# Altium PCB backplane.PCBDOC (part 1 of 4)
Units mil, origin at the board's own origin, x right, y up, seen from the top; angles counter-clockwise.
Board outline 14000 x 4750 mil, 6 copper layers (Top Layer, Internal Plane 1, Mid-Layer 1, Mid-Layer 2, Internal Plane 2, Bottom Layer), stack 54.4 mil thick; 197 components, 240 nets, 1698 pads, 1024 vias.
Unrouted connection lines stored in the file: 2.
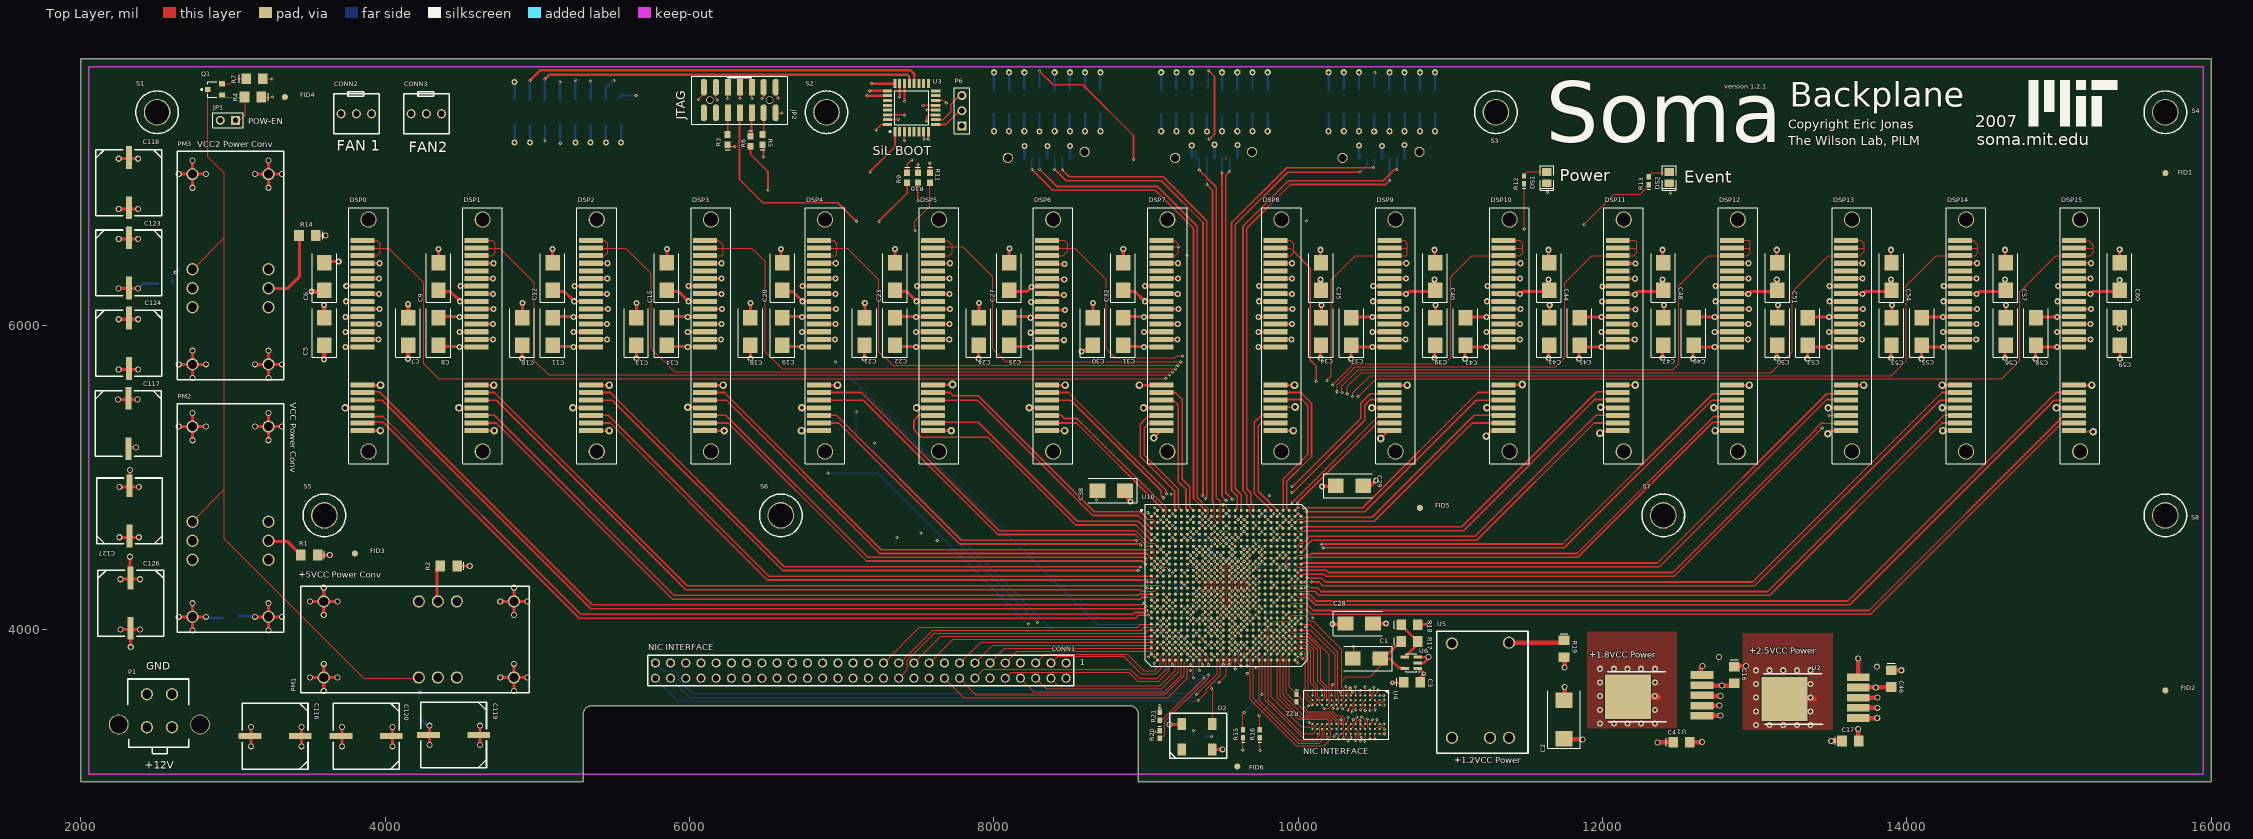
[diagram p0: Top Layer view]
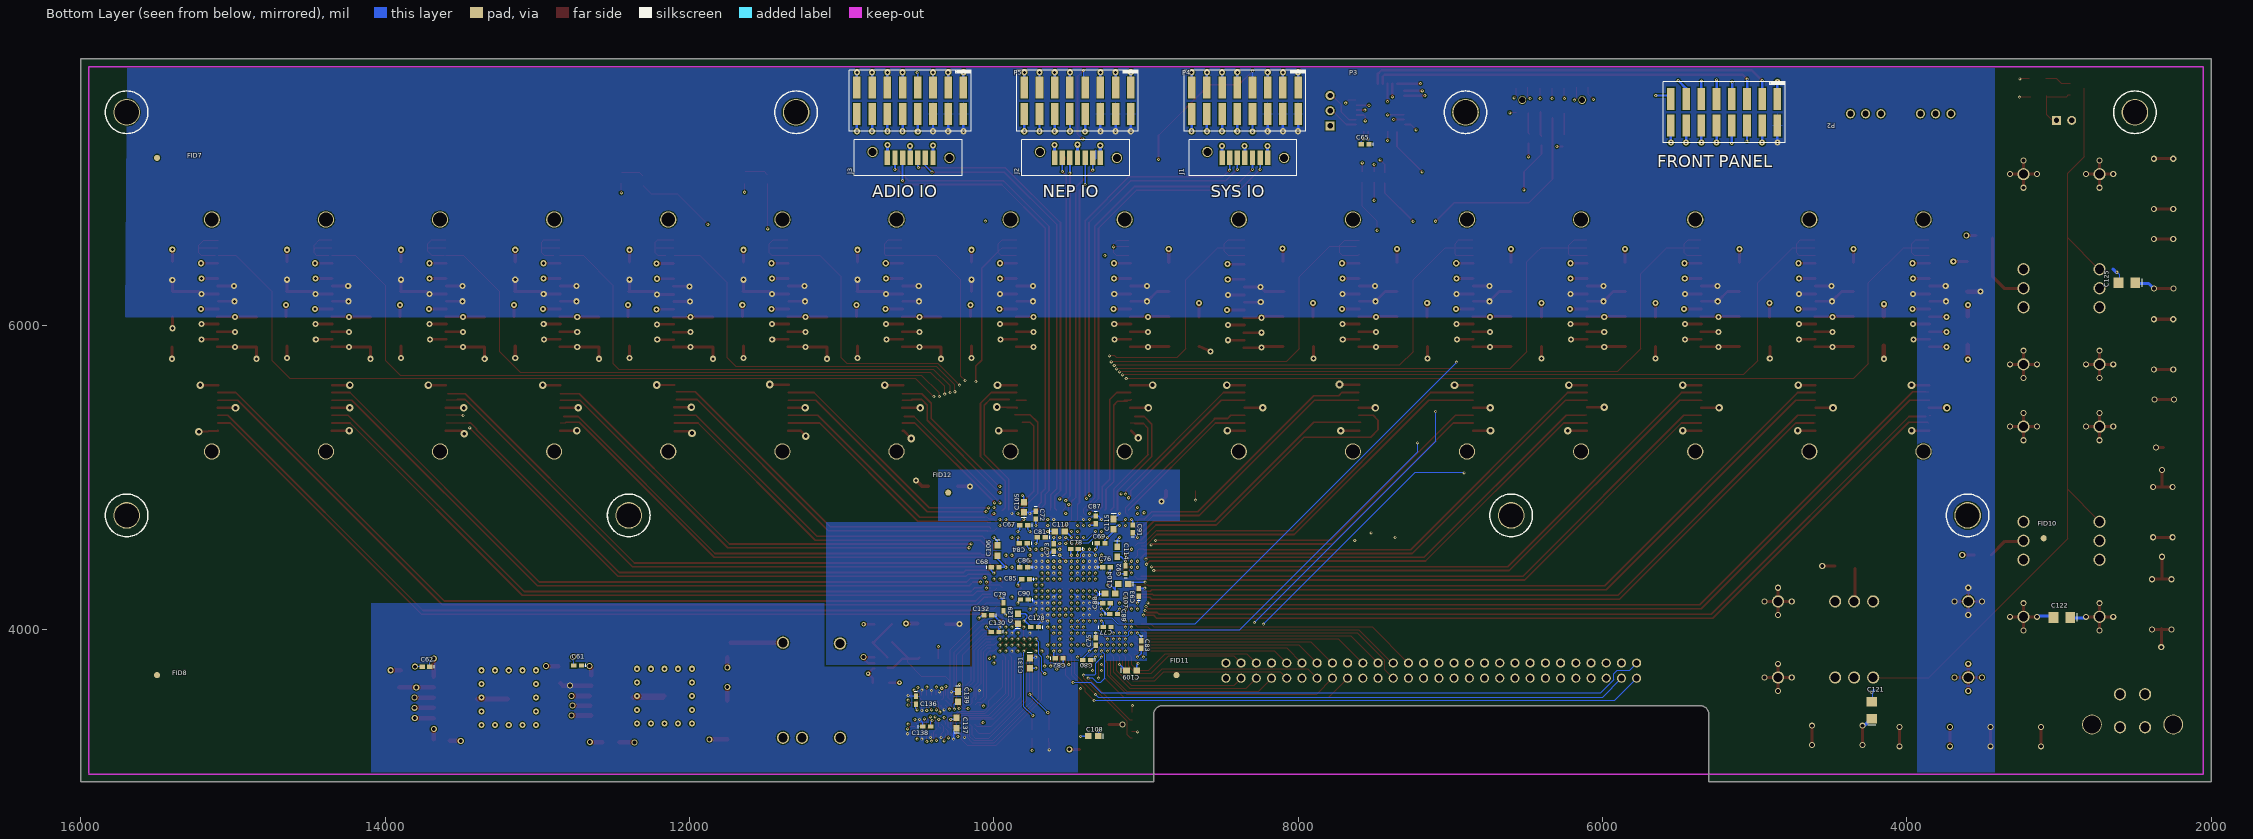
[diagram p1: Bottom Layer view, seen from below]
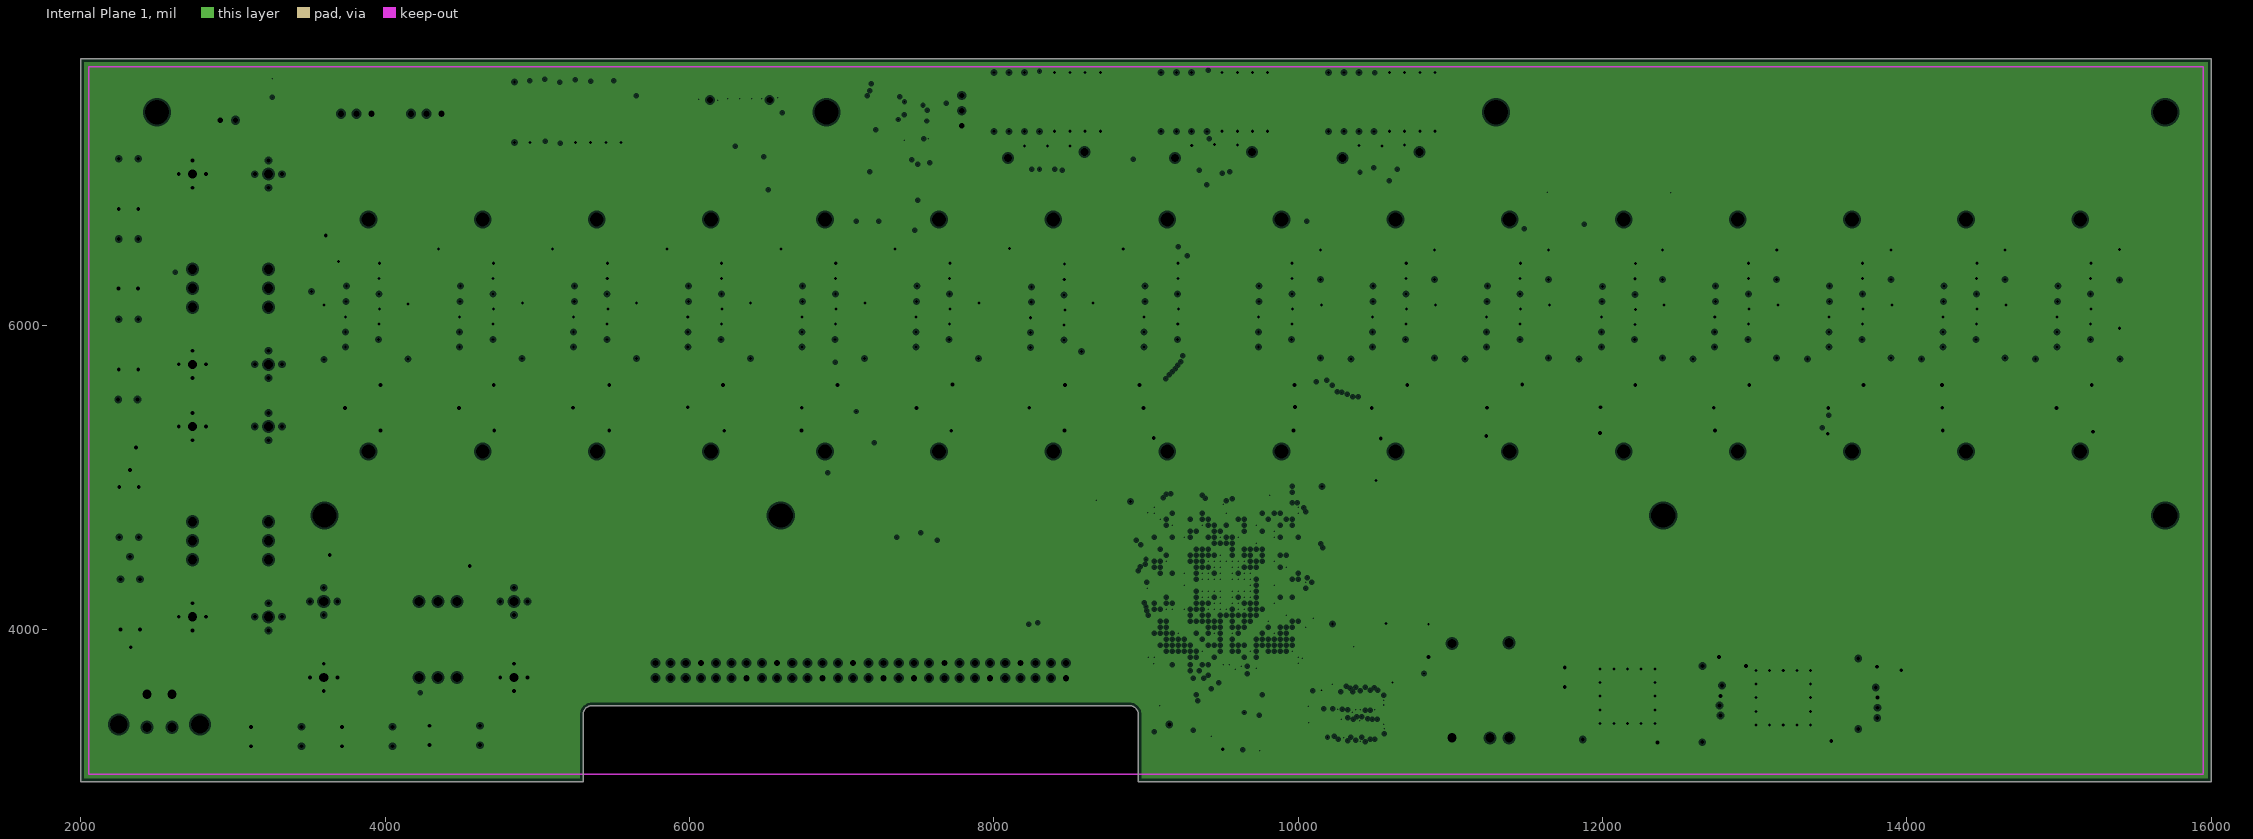
[diagram p2: Internal Plane 1, clearances drawn from the general rule]
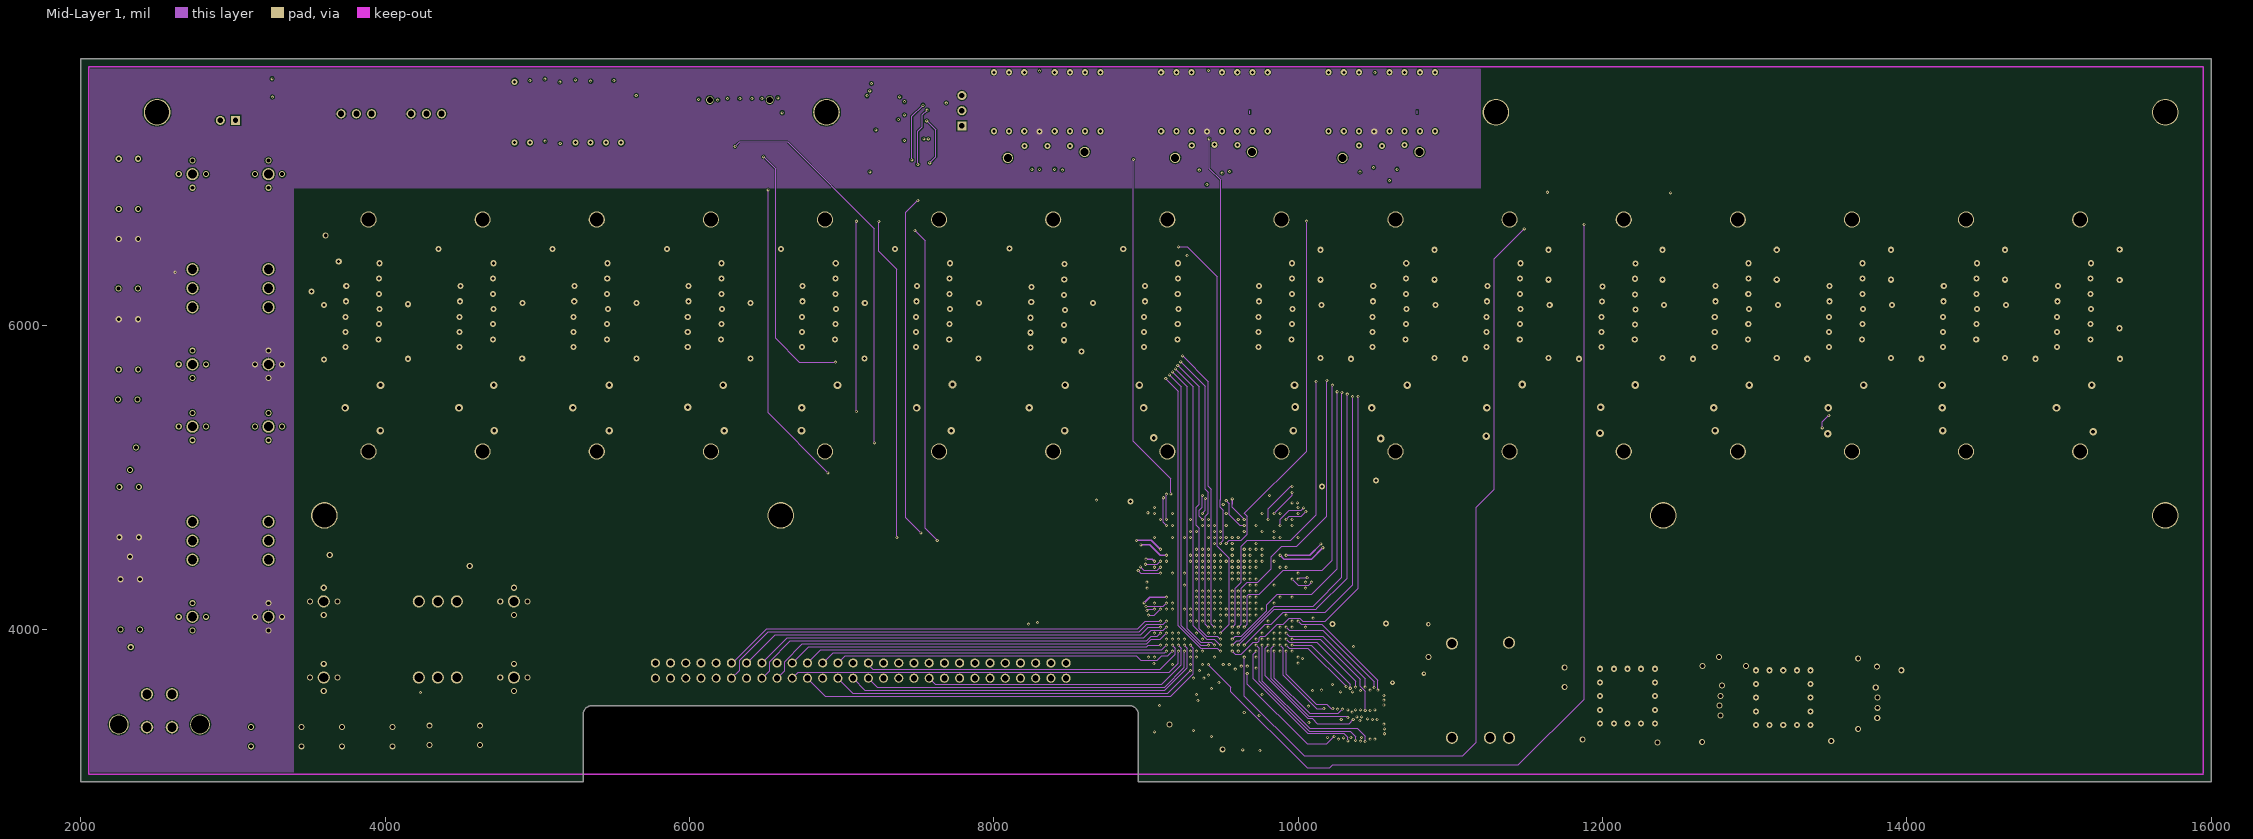
[diagram p3: Mid-Layer 1]
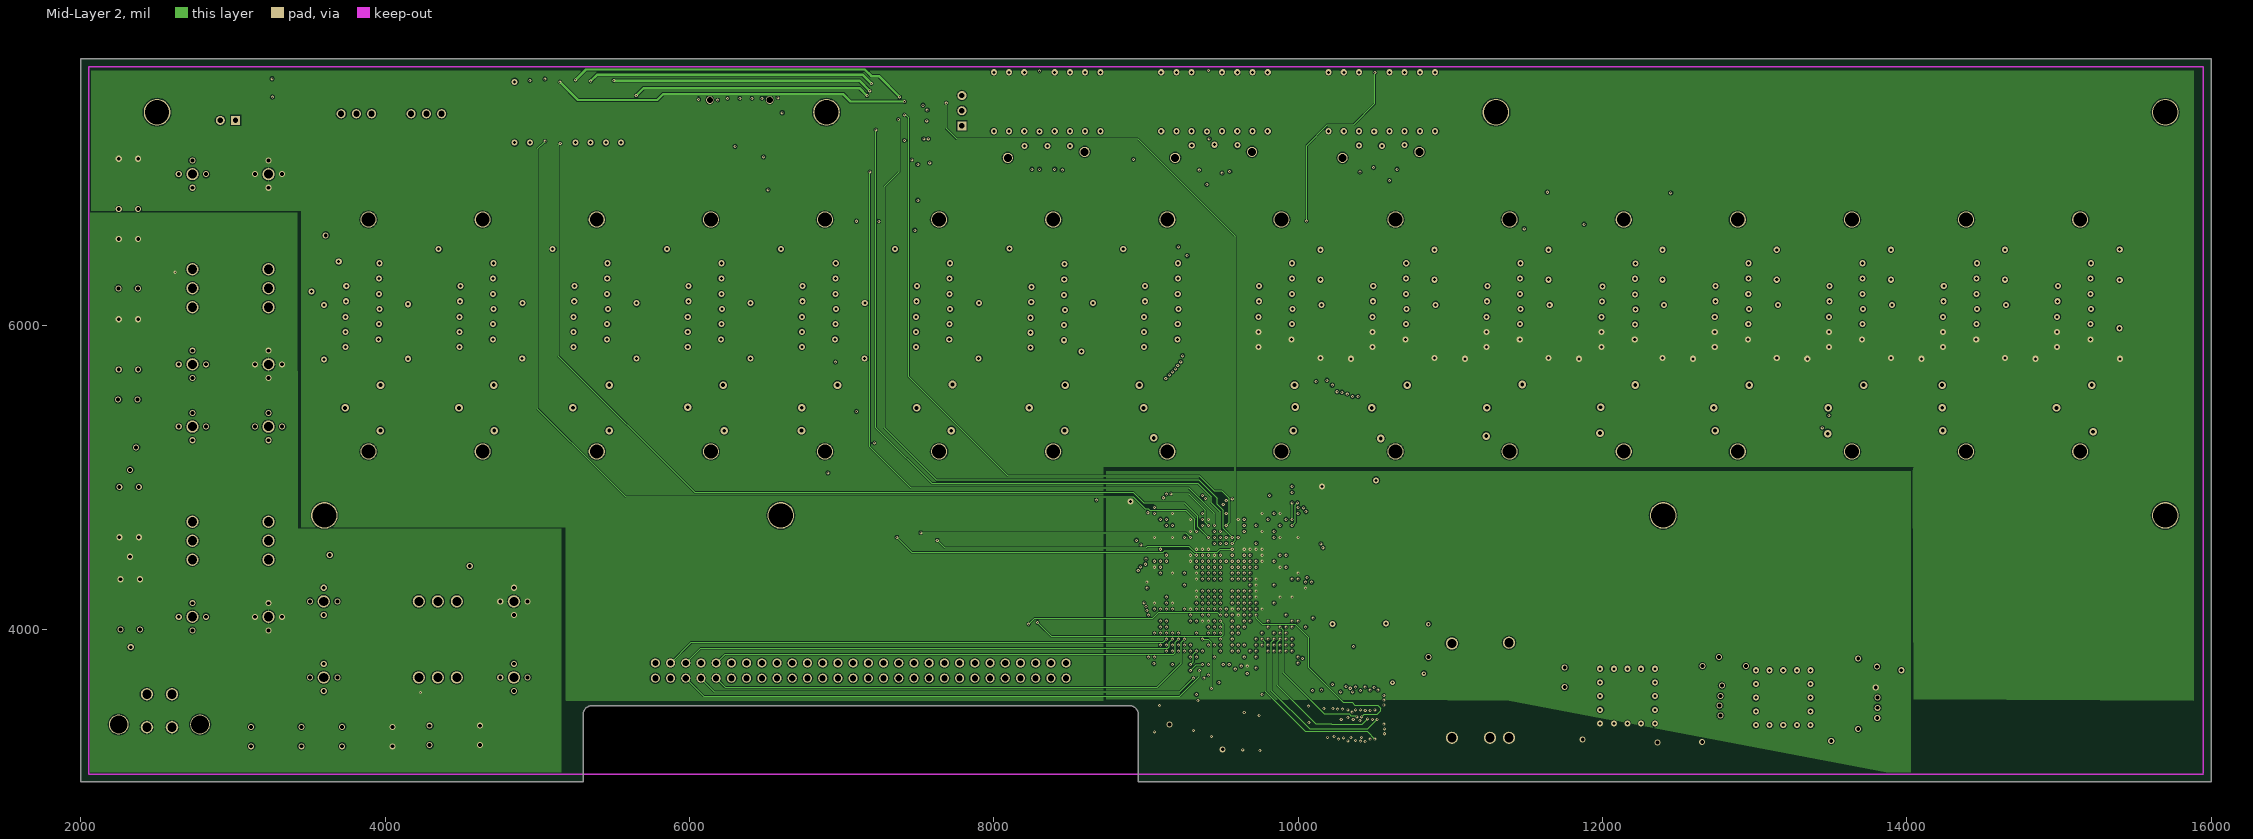
[diagram p4: Mid-Layer 2]
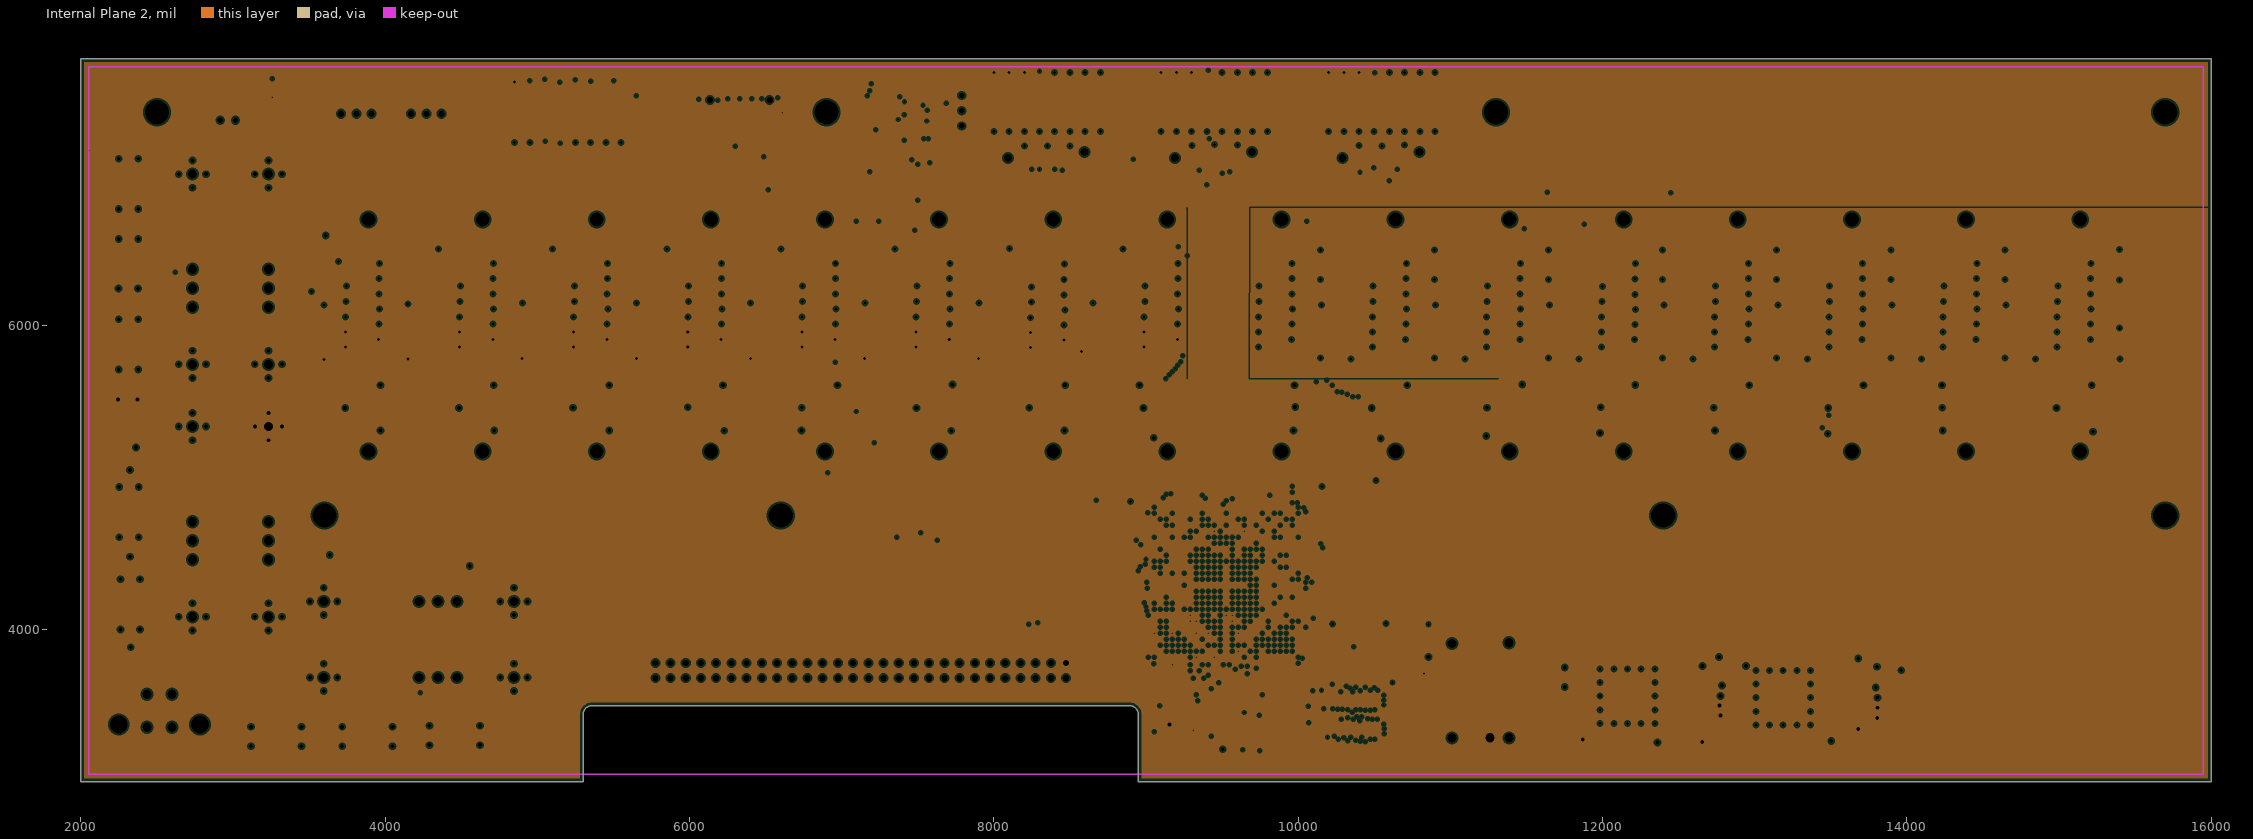
[diagram p5: Internal Plane 2, clearances drawn from the general rule]

## Layer stack, top to bottom
Top Layer: signal copper 1.4
Dielectric: core 7, FR-4, Dk 4.8
Internal Plane 1: plane copper 1.4, net GND
Dielectric: prepreg 13, FR-4, Dk 4.8
Mid-Layer 1: signal copper 1.4
Dielectric: core 7, FR-4, Dk 4.8
Mid-Layer 2: signal copper 1.4
Dielectric: prepreg 13, FR-4, Dk 4.8
Internal Plane 2: plane copper 1.4, net VCC
Dielectric: core 6, FR-4, Dk 4.8
Bottom Layer: signal copper 1.4

## Board outline
2000,3000 2000,7750 16000,7750 16000,3000 8950,3000 8950,3440.94 ccw(c8890.94,3440.94) 8890.94,3500 5359.06,3500 ccw(c5359.06,3440.94) 5300,3440.94 5300,3000

## Design rules (kind name [scope] priority, off if disabled: settings)
Clearance PolyClearance [( InPolygon)] p1: gap=6.5
Clearance [All] p2: gap=6
ComponentClearance [All] p1: gap=10 collisioncheckmode=3 verticalgap=10
HoleSize [All] p1: absolutevalues=TRUE maxlimit=180 minlimit=1 maxpercent=80.000 minpercent=20.000
PlaneClearance [All] p1: clearance=13 // for PCBpro service
PlaneConnect [All] p1: planeconnectstyle=Relief reliefexpansion=10 reliefentries=4 reliefconductorwidth=10 reliefairgap=7
PolygonConnect "BGA connect" [InNet('GND') And OnLayer('Top Layer')] p1: connectstyle=Relief reliefconductorwidth=6 reliefentries=2 polygonreliefangle="45 Angle"
PolygonConnect [All] p2: connectstyle=Relief reliefconductorwidth=10 reliefentries=4 polygonreliefangle="90 Angle"
RoomDefinition network [InComponentClass('network')] p1 off: confinementstyle=ConfineIn formatcopy=TRUE lockcomponents=FALSE outline 0,0 2000,0 2000,1000 0,1000
RoomDefinition DSPCONN.8-11 [InComponentClass('DSPCONN.8-11')] p2 off: confinementstyle=ConfineIn formatcopy=TRUE lockcomponents=FALSE outline 9560,4810 12725,4810 12725,7145 9560,7145
RoomDefinition fpga [InComponentClass('fpga')] p3 off: confinementstyle=ConfineIn formatcopy=TRUE lockcomponents=FALSE outline 0,0 2000,0 2000,1000 0,1000
RoomDefinition peripheralconn [InComponentClass('peripheralconn')] p4 off: confinementstyle=ConfineIn formatcopy=TRUE lockcomponents=FALSE outline 8082.66,6850.38 10933.05,6850.38 10933.05,7673.21 8082.66,7673.21
RoomDefinition DSPCONN.4-7 [InComponentClass('DSPCONN.4-7')] p5 off: confinementstyle=ConfineIn formatcopy=TRUE lockcomponents=FALSE outline 6335,4810 9560,4810 9560,7155 6335,7155
RoomDefinition DSPCONN.0-3 [InComponentClass('DSPCONN.0-3')] p6 off: confinementstyle=ConfineIn formatcopy=TRUE lockcomponents=FALSE outline 3635,4805 6335,4805 6335,7155 3635,7155
RoomDefinition DSPCONN.12-15 [InComponentClass('DSPCONN.12-15')] p7 off: confinementstyle=ConfineIn formatcopy=TRUE lockcomponents=FALSE outline 12725,4810 15450,4810 15450,7145 12725,7145
RoomDefinition "power and clocks" [InComponentClass('power and clocks')] p8 off: confinementstyle=ConfineIn formatcopy=TRUE lockcomponents=FALSE outline 2960.62,3078.73 2059.05,3078.73 2059.05,6456.68 2960.62,6456.68
RoutingVias [All] p1: holewidth=10 width=20 viastyle="Through Hole" minholewidth=10 minwidth=20 maxholewidth=28 maxwidth=50
SolderMaskExpansion bgacollapse [(IsVia AND InComponentClass('fpga'))] p1: expansion=-10
SolderMaskExpansion [All] p2: expansion=4
TestPointUsage [All] p1: valid=0 allowmultiple=FALSE
Testpoint [All] p1: side=15 testpointundercomponent=TRUE minsize=40 maxsize=100 preferedsize=60 minholesize=0 maxholesize=40 preferedholesize=32 testpointgrid=1 style=1023 order=0-112345678
Width [All] p1: maxlimit=30 minlimit=6 preferedwidth=8 toplayer_prefwidth=16 midlayer1_prefwidth=6 midlayer2_prefwidth=6 bottomlayer_prefwidth=6 minimp=50.000000 maximp=50.000000 favimp=50.000000
14 further rules are at their usual default settings.

## Classes and differential pairs
component class "power and clocks": C1 C2 C3 C4 C16 C17 C46 C61 C62 C116 C117 C118 C119 C120 C121 C122 C123 C124 C125 C126 C127 C? CONN2 CONN3 FID1 FID2 FID3 FID4 FID5 FID6 FID7 FID8 FID10 FID11 FID12 JP1 P1 PM1 PM2 PM3 PM? Q1 R1 R2 R4 R7 R14 R17 R18 R19 R? S1 S2 S3 S4 S5 S6 S7 S8 S9 U1 U2 U5 U6
component class fpga: C28 C29 C38 C63 C64 C65 C67 C68 C69 C72 C73 C75 C76 C77 C78 C79 C80 C81 C82 C83 C84 C85 C86 C87 C88 C89 C90 C91 C92 C93 C104 C105 C106 C107 C108 C109 C110 C114 C115 C128 C129 C130 C131 C132 C136 C137 C138 C139 DS1 DS2 JP2 O1 O2 P2 P6 R3 R5 R6 R9 R10 R11 R12 R13 U3 U10
component class DSPCONN.12-15: C49 C50 C51 C52 C53 C54 C55 C56 C57 C58 C59 C60 DSP12 DSP13 DSP14 DSP15
component class DSPCONN.8-11: C34 C35 C37 C39 C40 C41 C43 C44 C45 C47 C48 DSP8 DSP9 DSP10 DSP11 R23 R24
component class DSPCONN.4-7: C19 C20 C21 C22 C23 C24 C25 C27 C30 C31 C32 DSP4 DSP5 DSP6 DSP7
component class DSPCONN.0-3: C5 C6 C7 C8 C9 C10 C11 C12 C13 C14 C15 C18 DSP0 DSP1 DSP2 DSP3
component class peripheralconn: J1 J2 J3 P3 P4 P5
component class network: C26 CONN1 R15 R16 R20 R21 R22 U4

## Components (designator, comment, footprint, x,y, rotation, side; value= is the part's Value field where it differs from the comment)
C1 "POLCAP2" 6032 10450,3810 r180 top
C2 "A700D107M006AT" 7343 11748.01,3409.44 r90 top
C3 "10uF" 1206 10748.01,3653.54 r0 top
C4 "10uF" 1206 12519.66,3259.84 r0 top
C5 "" 6032 3600,5960 r90 top
C6 "" 6032 3600,6320 r90 top
C7 "" 6032 4150,5960 r90 top
C8 "" 6032 4350,5960 r90 top
C9 "" 6032 4350,6320 r90 top
C10 "" 6032 4900,5960 r90 top
C11 "" 6032 5100,5960 r90 top
C12 "" 6032 5100,6320 r90 top
C13 "" 6032 5650,5960 r90 top
C14 "" 6032 5850,5960 r90 top
C15 "" 6032 5850,6320 r90 top
C16 "10uF" 1206 12866.12,3700.78 r270 top
C17 "10uF" 1206 13629.89,3267.71 r0 top
C18 "" 6032 6400,5960 r90 top
C19 "POLCAP2" 6032 6610,5960 r90 top
C20 "POLCAP2" 6032 6610,6320 r90 top
C21 "POLCAP2" 6032 7150,5960 r90 top
C22 "POLCAP2" 6032 7350,5960 r90 top
C23 "POLCAP2" 6032 7350,6320 r90 top
C24 "POLCAP2" 6032 7900,5960 r90 top
C25 "POLCAP2" 6032 8100,5960 r90 top
C27 "POLCAP2" 6032 8100,6320 r90 top
C28 "POLCAP2" 6032 10401.57,4039.37 r0 top
C29 "POLCAP2" 6032 10338.58,4944.88 r0 top
C30 "POLCAP2" 6032 8650,5960 r90 top
C31 "POLCAP2" 6032 8850,5960 r90 top
C32 "POLCAP2" 6032 8850,6320 r90 top
C34 "POLCAP2" 6032 10150,5960 r90 top
C35 "POLCAP2" 6032 10150,6320 r90 top
C37 "POLCAP2" 6032 10350,5960 r90 top
C38 "POLCAP2" 6032 8771.65,4913.39 r180 top
C39 "POLCAP2" 6032 10900,5960 r90 top
C40 "POLCAP2" 6032 10900,6320 r90 top
C41 "POLCAP2" 6032 11100,5960 r90 top
C43 "POLCAP2" 6032 11650,5960 r90 top
C44 "POLCAP2" 6032 11650,6320 r90 top
C45 "POLCAP2" 6032 11850,5960 r90 top
C46 "10uF" 1206 13897.61,3677.16 r270 top
C47 "POLCAP2" 6032 12400,5960 r90 top
C48 "POLCAP2" 6032 12400,6320 r90 top
C49 "POLCAP2" 6032 12600,5960 r90 top
C50 "POLCAP2" 6032 13150,5960 r90 top
C51 "POLCAP2" 6032 13150,6320 r90 top
C52 "POLCAP2" 6032 13350,5960 r90 top
C53 "POLCAP2" 6032 13900,5960 r90 top
C54 "POLCAP2" 6032 13900,6320 r90 top
C55 "POLCAP2" 6032 14100,5960 r90 top
C56 "POLCAP2" 6032 14650,5960 r90 top
C57 "POLCAP2" 6032 14650,6320 r90 top
C58 "POLCAP2" 6032 14850,5960 r90 top
C59 "POLCAP2" 6032 15400,5960 r90 top
C60 "POLCAP2" 6032 15400,6320 r90 top
C61 "CAPACITOR" 0402 12736.13,3763.77 r0 bottom
C62 "CAPACITOR" 0402 13732.26,3755.9 r0 bottom
C65 "CAPACITOR" 0402 7560,7190 r0 bottom
C67 "CAPACITOR" 0402 9803.15,4685.04 r0 bottom
C68 "CAPACITOR" 0402 9992.13,4409.45 r180 bottom
C69 "CAPACITOR" 0402 9295.34,4566.93 r180 bottom
C72 "CAPACITOR" 0402 9724.41,4752.03 r270 bottom
C73 "CAPACITOR" 0402 9606.3,4539.31 r90 bottom
C75 "CAPACITOR" 0402 9330.69,3921.25 r270 bottom
C76 "CAPACITOR" 0402 9259.84,4409.45 r180 bottom
C77 "CAPACITOR" 0402 9255.97,4015.75 r180 bottom
C78 "CAPACITOR" 0402 9470,4530 r0 bottom
C79 "CAPACITOR" 0402 9937.01,4149.61 r270 bottom
C80 "CAPACITOR" 0402 9390,3800 r0 bottom
C81 "CAPACITOR" 0402 9688.91,4606.3 r0 bottom
C82 "CAPACITOR" 0402 9570.93,3811.02 r180 bottom
C83 "CAPACITOR" 0402 9031.5,3901.64 r270 bottom
C84 "CAPACITOR" 0402 9807.02,4566.93 r0 bottom
C85 "CAPACITOR" 0402 9791.28,4330.71 r0 bottom
C86 "CAPACITOR" 0402 9803.15,4409.45 r0 bottom
C87 "CAPACITOR" 0402 9330.71,4720.53 r270 bottom
C88 "CAPACITOR" 0402 9259.84,4173.23 r180 bottom
C89 "CAPACITOR" 0402 9212.58,4102.35 r180 bottom
C90 "CAPACITOR" 0402 9799.15,4196.85 r0 bottom
C91 "CAPACITOR" 0402 9086.61,4661.42 r90 bottom
C92 "CAPACITOR" 0402 9133.86,4393.7 r90 bottom
C93 "CAPACITOR" 0402 9047.24,4244.09 r90 bottom
C104 "CAPACITOR" 0603 9149.61,4299.21 r0 bottom
C105 "CAPACITOR" 0603 9803.15,4803.15 r90 bottom
C106 "CAPACITOR" 0603 9976.38,4519.69 r270 bottom
C107 "CAPACITOR" 0603 9236.22,4236.22 r180 bottom
C108 "CAPACITOR" 0603 9346.44,3299.21 r0 bottom
C109 "CAPACITOR" 0603 9094.49,3732.28 r180 bottom
C110 "CAPACITOR" 0603 9566.93,4645.67 r180 bottom
C114 "CAPACITOR" 0603 9188.98,4511.81 r270 bottom
C115 "CAPACITOR" 0603 9212.6,4692.91 r270 bottom
C116 "EEV-FK1V331P" PanasonicG 3275.58,3299.21 r0 top
C117 "EEV-FK1V331P" PanasonicG 2311.01,5354.31 r90 top
C118 "EEV-FK1V331P" PanasonicG 2314.96,6936.99 r90 top
C119 "EEV-FK1V331P" PanasonicG 4448.81,3307.08 r0 top
C120 "EEV-FK1V331P" PanasonicG 3874.01,3299.21 r0 top
C121 "10uF" 1206 4230,3470 r90 bottom
C122 "10uF" 1206 2980,4080 r0 bottom
C123 "EEV-FK1V331P" PanasonicG 2314.96,6409.44 r90 top
C124 "EEV-FK1V331P" PanasonicG 2314.96,5881.88 r90 top
C125 "10uF" 1206 2553.13,6280 r0 bottom
C126 "EEV-FK1V331P" PanasonicG 2326.76,4173.21 r90 top
C127 "EEV-FK1V331P" PanasonicG 2318.89,4779.51 r270 top
C128 "CAPACITOR" 0402 9732.26,4015.74 r0 bottom
C129 "CAPACITOR" 0603 9842.5,4070.86 r90 bottom
C130 "CAPACITOR" 0402 9992.11,3984.24 r0 bottom
C131 "CAPACITOR" 0603 9763.76,3779.52 r270 bottom
C132 "CAPACITOR" 0402 10039.35,4094.48 r0 bottom
C136 "CAPACITOR" 0402 10511.79,3535.43 r270 bottom
C137 "CAPACITOR" 0603 10244.07,3385.82 r90 bottom
C138 "CAPACITOR" 0402 10440.92,3362.2 r180 bottom
C139 "CAPACITOR" 0603 10236.2,3559.05 r270 bottom
CONN1 "CON56B" HDR56 8475,3780 r0 top
CONN2 "3-pin header for case fan" CASEFANHDR 3810,7390 r0 top
CONN3 "3-pin header for case fan" CASEFANHDR 4270,7390 r0 top
DS1 "LED3" "SMD _LED" 11635,6970 r90 top
DS2 "LED3" "SMD _LED" 12440,6970 r90 top
DSP0 "SATA 23-pin header" "MOLEX 87713-1001" 3890,5170 r90 top
DSP1 "SATA 23-pin header" "MOLEX 87713-1001" 4640,5170 r90 top
DSP2 "SATA 23-pin header" "MOLEX 87713-1001" 5390,5170 r90 top
DSP3 "SATA 23-pin header" "MOLEX 87713-1001" 6140,5170 r90 top
DSP4 "SATA 23-pin header" "MOLEX 87713-1001" 6890,5170 r90 top
DSP5 "SATA 23-pin header" "MOLEX 87713-1001" 7640,5170 r90 top
DSP6 "SATA 23-pin header" "MOLEX 87713-1001" 8390,5170 r90 top
DSP7 "SATA 23-pin header" "MOLEX 87713-1001" 9140,5170 r90 top
DSP8 "SATA 23-pin header" "MOLEX 87713-1001" 9890,5170 r90 top
DSP9 "SATA 23-pin header" "MOLEX 87713-1001" 10640,5170 r90 top
DSP10 "SATA 23-pin header" "MOLEX 87713-1001" 11390,5170 r90 top
DSP11 "SATA 23-pin header" "MOLEX 87713-1001" 12140,5170 r90 top
DSP12 "SATA 23-pin header" "MOLEX 87713-1001" 12890,5170 r90 top
DSP13 "SATA 23-pin header" "MOLEX 87713-1001" 13640,5170 r90 top
DSP14 "SATA 23-pin header" "MOLEX 87713-1001" 14390,5170 r90 top
DSP15 "SATA 23-pin header" "MOLEX 87713-1001" 15140,5170 r90 top
FID1 "FIDUCIAL" FIDUCIAL 15700,7000 r90 top
FID2 "FIDUCIAL" FIDUCIAL 15700,3600 r90 top
FID3 "FIDUCIAL" FIDUCIAL 3800,4500 r90 top
FID4 "FIDUCIAL" FIDUCIAL 3340,7500 r90 top
FID5 "FIDUCIAL" FIDUCIAL 10800,4800 r90 top
FID6 "FIDUCIAL" FIDUCIAL 9600,3100 r90 top
FID7 "FIDUCIAL" FIDUCIAL 15500,7100 r270 bottom
FID8 "FIDUCIAL" FIDUCIAL 15500,3700 r270 bottom
FID10 "FIDUCIAL" FIDUCIAL 3100,4600 r90 bottom
FID11 "FIDUCIAL" FIDUCIAL 8800,3700 r90 bottom
FID12 "FIDUCIAL" FIDUCIAL 10300,4900 r270 bottom
J1 "SATA 7-pin header" "MOLES 67800-5005" 8500,7100 r0 bottom
J2 "SATA 7-pin header" "MOLES 67800-5005" 9600,7100 r0 bottom
J3 "SATA 7-pin header" "MOLES 67800-5005" 10700,7100 r0 bottom
JP1 "Header 2" HDR1X2 3015.74,7346.44 r180 top
JP2 "Header 7X2" "SMT 2X7 2MM HDR" 6330,7480 r0 top
O2 "OSC2" ECS-3953M 9236.2,3212.59 r0 top
P1 "Header 4" "MOLEX 39-29-9042" 2433.07,3574.8 r180 top
P2 "Header 8X2" "MOLEX 15-91-2160" 5200,7400 r180 bottom
P3 "Header 8X2" "MOLEX 15-91-2160" 8350,7475 r180 bottom
P4 "Header 8X2" "MOLEX 15-91-2160" 9450,7475 r180 bottom
P5 "Header 8X2" "MOLEX 15-91-2160" 10550,7475 r180 bottom
P6 "Header 3" HDR1X3 7790,7310 r90 top
PM1 "PTH12010WAH" PTH12010WAH 4845.46,3685.03 r180 top
PM2 "PTH12010WAH" PTH12010WAH 2732.28,4083.65 r90 top
PM3 "PTH12010WAH" PTH12010WAH 2732.28,5743.1 r90 top
Q1 "BSS138" SO-G3/D4.1 2880,7550 r90 top
R1 "2.0k" 1206 3500,4490 r180 top
R2 "280" 1206 4417.31,4417.31 r180 top
R3 "current-limiting series res" 0603 6250,7220 r90 top
R4 "5k" 1206 3130,7500 r180 top
R5 "current-limiting series res" 0603 6480,7220 r90 top
R6 "current-limiting series res" 0603 6400,7210 r270 top
R7 "5k" 1206 3140,7620 r0 top
R9 "RESISTOR" 0603 7430,6970 r270 top
R10 "RESISTOR" 0603 7500,6970 r270 top
R11 "RESISTOR" 0603 7580,6970 r270 top
R12 "current-limiting series res" 0402 11485,6955 r90 top
R13 "current-limiting series res" 0402 12305,6950 r90 top
R14 "2.0k" 1206 3488.18,6590.54 r180 top
R15 "50" 0402 9637.78,3314.95 r90 top
R16 "50" 0402 9748.01,3314.95 r90 top
R17 "23.2k" 1206 10732.26,3921.25 r0 top
R18 "66.5k" 1206 10732.26,4031.49 r0 top
R19 "RESISTOR" 1206 11748.01,3874.01 r270 top
R20 "50" 0402 9090,3310 r270 top
R21 "50" 0402 9090,3430 r270 top
R22 "50" 0402 9990,3550 r270 top
S1 "6-32 Mounting Screw" SCREW6-32 2500,7400 r0 top
S2 "6-32 Mounting Screw" SCREW6-32 6900,7400 r0 top
S3 "6-32 Mounting Screw" SCREW6-32 11300,7400 r0 top
S4 "6-32 Mounting Screw" SCREW6-32 15700,7400 r0 top
S5 "6-32 Mounting Screw" SCREW6-32 3600,4750 r0 top
S6 "6-32 Mounting Screw" SCREW6-32 6600,4750 r0 top
S7 "6-32 Mounting Screw" SCREW6-32 12400,4750 r0 top
S8 "6-32 Mounting Screw" SCREW6-32 15700,4750 r0 top
U1 "TPS78618 1.8 V" KTT 12678.52,3432.92 r90 top
U2 "TPS78625 2.5 V" KTT 13706.82,3418.3 r90 top
U3 "*" QFP7x7-G32/N 7460,7430 r90 top
U4 "MT47H6M16BG-3" MICRON84FBGA 10314.94,3440.94 r270 top locked
U5 "PTH03000WAH" "TI EUS" 11010.8,3288.38 r90 top
U6 "TPS76201" SO-G5/X.5 10743.09,3781.49 r90 top
U10 "XC4VLX25-10FF668C" "Xilinx FF668" 9527.56,4291.34 r0 top locked

## Footprints (in the part's own frame and the unit in brackets; to place one, negate y for a bottom-side part, rotate by r counter-clockwise, add the part's x,y. Pads: shape width x height; smd on the part's side, far side on the other; paste and mask are expansions set on the pad)
0402 [mm] "Standard-sized 0402 Passive"
  rect 0.9x0.7 smd: 1(-0.65,0) 2(0.65,0)
  silkscreen extent -1.4,-0.25 -1.4,0.25
0603 [mm] "Standard-sized 0603 Passive"
  rect 1.1x1 smd: 1(-0.85,0) 2(0.85,0)
  silkscreen extent -1.7,-0.4 -1.7,0.4
1206 [mm] "Standard-sized 1206 Passive"
  rect 1.6x1.8 smd: 1(-1.4,0) 2(1.4,0)
  silkscreen extent -2.53,-0.65 -2.53,0.65
6032 [mm] "Standard-Sized 7343 Polarized Leadless Cap"
  rect 2.6x2.4 smd: 1(-2.3,0) 2(2.3,0)
  silkscreen extent -4.32,-2.03 3.81,2.05
7343 [mm] "Standard-Sized 7343 Polarized Leadless Cap"
  rect 2.6x2.8 smd: 1(-3.2,0) 2(3.2,0)
  silkscreen extent -4.8,-2.7 4.8,2.7
CASEFANHDR [mil] "3-pin polarized case fan header"
  round 60 hole 40: 1(-100,0) 2(0,0) 3(100,0)
  silkscreen extent -150,-130 150,145
ECS-3953M [mm] "ECS SMD CLOCK OSCILLATOR"
  rect 1.4x2 smd: 1(0,0) 2(5.08,0) 3(5.08,4.2) 4(0,4.2)
  silkscreen extent -2,-1.5 7.5,6
FIDUCIAL [mil] "Fiducial footprint as recommended by PCBpro"
  round 40 smd paste-20 mask+30: 0(0,0)
HDR1X2 [mm] "Connector; Header; 2 Position"
  rect 1.5x1.5 hole 0.9: 1(0,0)
  round 1.5 hole 0.9: 2(2.54,0)
  silkscreen extent -1.27,-1.27 3.81,1.27
HDR1X3 [mm] "Connector; Header; 3 Position"
  rect 1.5x1.5 hole 0.9: 1(0,0)
  round 1.5 hole 0.9: 2(2.54,0) 3(5.08,0)
  silkscreen extent -1.27,-1.27 6.35,1.27
HDR56 [mil]
  round 60 hole 40: 1(0,0) 2(0,-100) 3(-100,0) 4(-100,-100) 5(-200,0) 6(-200,-100) 7(-300,0) 8(-300,-100) 9(-400,0) 10(-400,-100) 11(-500,0) 12(-500,-100) 13(-600,0) 14(-600,-100) 15(-700,0) 16(-700,-100) 17(-800,0) 18(-800,-100) 19(-900,0) 20(-900,-100) 21(-1000,0) 22(-1000,-100) 23(-1100,0) 24(-1100,-100) 25(-1200,0) 26(-1200,-100) 27(-1300,0) 28(-1300,-100) 29(-1400,0) 30(-1400,-100) 31(-1500,0) 32(-1500,-100) 33(-1600,0) 34(-1600,-100) 35(-1700,0) 36(-1700,-100) 37(-1800,0) 38(-1800,-100) 39(-1900,0) 40(-1900,-100) 41(-2000,0) 42(-2000,-100) 43(-2100,0) 44(-2100,-100) 45(-2200,0) 46(-2200,-100) 47(-2300,0) 48(-2300,-100) 49(-2400,0) 50(-2400,-100) 51(-2500,0) 52(-2500,-100) 53(-2600,0) 54(-2600,-100) 55(-2700,0) 56(-2700,-100)
  silkscreen extent -2750,-150 50,50
KTT [mil] "TI DDPAK-5"
  rect 50x150 smd: 1(0,25) 2(67,25) 3(134,25) 4(201,25) 5(268,25)
  rect 290x300 smd: 3(125,510)
  silkscreen extent -40,260 290,645
MICRON84FBGA [mm]
  round 0.33 smd paste-0.508 mask+0.15: A1(-3.2,5.6) A2(-2.4,5.6) A3(-1.6,5.6) A7(1.6,5.6) A8(2.4,5.6) A9(3.2,5.6) B1(-3.2,4.8) B2(-2.4,4.8) B3(-1.6,4.8) B7(1.6,4.8) B8(2.4,4.8) B9(3.2,4.8) C1(-3.2,4) C2(-2.4,4) C3(-1.6,4) C7(1.6,4) C8(2.4,4) C9(3.2,4) D1(-3.2,3.2) D2(-2.4,3.2) D3(-1.6,3.2) D7(1.6,3.2) D8(2.4,3.2) D9(3.2,3.2) E1(-3.2,2.4) E2(-2.4,2.4) E3(-1.6,2.4) E7(1.6,2.4) E8(2.4,2.4) E9(3.2,2.4) F1(-3.2,1.6) F2(-2.4,1.6) F3(-1.6,1.6) F7(1.6,1.6) F8(2.4,1.6) F9(3.2,1.6) G1(-3.2,0.8) G2(-2.4,0.8) G3(-1.6,0.8) G7(1.6,0.8) G8(2.4,0.8) G9(3.2,0.8) H1(-3.2,0) H2(-2.4,0) H3(-1.6,0) H7(1.6,0) H8(2.4,0) H9(3.2,0) J1(-3.2,-0.8) J2(-2.4,-0.8) J3(-1.6,-0.8) J7(1.6,-0.8) J8(2.4,-0.8) J9(3.2,-0.8) K2(-2.4,-1.6) K3(-1.6,-1.6) K7(1.6,-1.6) K8(2.4,-1.6) K9(3.2,-1.6) L1(-3.2,-2.4) L2(-2.4,-2.4) L3(-1.6,-2.4) L7(1.6,-2.4) L8(2.4,-2.4) M2(-2.4,-3.2) M3(-1.6,-3.2) M7(1.6,-3.2) M8(2.4,-3.2) M9(3.2,-3.2) N1(-3.2,-4) N2(-2.4,-4) N3(-1.6,-4) N7(1.6,-4) N8(2.4,-4) P1(3.2,-4.8) P2(-2.4,-4.8) P3(-1.6,-4.8) P7(1.6,-4.8) P8(2.4,-4.8) R1(-3.2,-5.6) R2(-2.4,-5.6) R3(-1.6,-5.6) R7(1.6,-5.6) R8(2.4,-5.6)
  silkscreen extent -4.1,-7.1 4.1,7.1
"MOLES 67800-5005" [mm] "SATA vertical PCB HEADER SMT"
  round 1.7 hole 1.35: 0(-10.37,0) 0(2.46,-1)
  rect 0.9x2.4 smd: 1(0,0) 2(-1.27,0) 3(-2.54,0) 4(-3.81,0) 5(-5.08,0) 6(-6.35,0) 7(-7.62,0)
  silkscreen extent -12.5,-3 5.5,3
"MOLEX 15-91-2160" [mm] "SMT 100-mil pitch 16 -pin dual-row header"
  rect 1.27x3.68 smd: 1(8.89,2.22) 2(8.89,-2.22) 3(6.35,2.22) 4(6.35,-2.22) 5(3.81,2.22) 6(3.81,-2.22) 7(1.27,2.22) 8(1.27,-2.22) 9(-1.27,2.22) 10(-1.27,-2.22) 11(-3.81,2.22) 12(-3.81,-2.22) 13(-6.35,2.22) 14(-6.35,-2.22) 15(-8.89,2.22) 16(-8.89,-2.22)
  silkscreen extent -10.16,-5.08 10.16,5.08
"MOLEX 39-29-9042" [mil] "Molex 4-pin ATX VCC2 header"
  round 130 hole 118 paste-20 mask+30: 0(-350,199) 0(185,199)
  round 80 hole 60: 1(0,0) 2(-165,0) 3(0,217) 4(-165,217)
  silkscreen extent -275,-100 125,390
"MOLEX 87713-1001" [mm] "Molex Serial ATA Backplane Std. Height"
  round 2.7 hole 2.3: 0(0,0) 0(38.73,0)
  rect 0.85x4 smd: 1(3.49,1) 2(4.76,1) 3(6.03,1) 4(7.3,1) 5(8.57,1) 6(9.84,1) 7(11.11,1) P1(17.46,1) P2(18.73,1) P3(20,1) P4(21.27,1) P5(22.54,1) P6(23.81,1) P7(25.08,1) P8(26.35,1) P9(27.62,1) P10(28.89,1) P11(30.16,1) P12(31.43,1) P13(32.7,1) P14(33.97,1) P15(35.24,1)
  silkscreen extent -2,-3.3 40.73,3.3
PanasonicG [mm]
  rect 3.8x1 smd: 1(4.2,0) 2(-4.2,0)
  silkscreen extent -5.5,-5.5 5.5,5.5
PTH12010WAH [mil] "Through-hole power module - EUH package"
  round 80 hole 60: 1(0,0) 2(0,-500) 3(375,-500) 4(500,-500) 5(625,-500) 6(1250,-500) 7(1250,0) 8(625,0) 9(500,0) 10(375,0)
  silkscreen extent -100,-600 1400,100
QFP7x7-G32/N [mm] "QFP; 32 Leads; Body 7 x 7 mm; Pitch 0.8 mm"
  rect 1.55x0.5 smd: 1(-4.025,2.8) 2(-4.025,2) 3(-4.025,1.2) 4(-4.025,0.4) 5(-4.025,-0.4) 6(-4.025,-1.2) 7(-4.025,-2) 8(-4.025,-2.8) 17(4.025,-2.8) 18(4.025,-2) 19(4.025,-1.2) 20(4.025,-0.4) 21(4.025,0.4) 22(4.025,1.2) 23(4.025,2) 24(4.025,2.8)
  rect 0.5x1.55 smd: 9(-2.8,-4.025) 10(-2,-4.025) 11(-1.2,-4.025) 12(-0.4,-4.025) 13(0.4,-4.025) 14(1.2,-4.025) 15(2,-4.025) 16(2.8,-4.025) 25(2.8,4.025) 26(2,4.025) 27(1.2,4.025) 28(0.4,4.025) 29(-0.4,4.025) 30(-1.2,4.025) 31(-2,4.025) 32(-2.8,4.025)
  silkscreen extent -4.12,-2.85 2.85,3.72
SCREW6-32 [mil] "6-32 screw"
  round 175 hole 160 paste-20 mask+30: 0(0,0)
  silkscreen extent -140,-140 140,140
"SMD _LED" [mm] "SMT LED; 2 Leads"
  rect 1.3x1.6 smd: 1(0.95,0) 2(-0.95,0)
  silkscreen extent -2.13,-1.15 2,1.15
"SMT 2X7 2MM HDR" [mm] "SMT dual-row 14-pin SMT header with posts, like Molex 87832-1420"
  round 1.27 hole 1.016: 0(-5,0) 0(5,0)
  oct 1x2.75 smd: 1(6,2.125) 2(6,-2.125) 3(4,2.125) 4(4,-2.125) 11(-4,2.125) 12(-4,-2.125) 13(-6,2.125) 14(-6,-2.125)
  rect 1x2.75 smd: 5(2,2.125) 6(2,-2.125) 7(0,2.125) 8(0,-2.125) 9(-2,2.125) 10(-2,-2.125)
  silkscreen extent -8,-4 8,4
SO-G3/D4.1 [mm] "SOT-23; 3 Leads; Body 3.0 x 2.5 mm, inc. leads (LxW max), Alternate Lead Configuration"
  rect 0.85x0.95 smd: 1(0,1.175) 2(-0.95,-1.175) 3(0.95,-1.175)
  silkscreen extent -1.27,-0.3 1.28,2.32
SO-G5/X.5 [mm] "SOT-23/SC-74A; 5 Leads; Body 3 x 3 mm, inc. leads (LxW max)"
  rect 0.5x1.45 smd: 1(-0.95,-1.075) 2(0,-1.075) 3(0.95,-1.075) 4(0.95,1.075) 5(-0.95,1.075)
  silkscreen extent -1.55,-1.35 1.5,0.9
"TI EUS" [mil] "Package for TI PTH03000W"
  round 80 hole 60: 1(0,0) 2(0,-250) 3(0,-375) 4(625,-375) 5(620,0)
  silkscreen extent -100,-500 700,100
"Xilinx FF668" [mm]
  round 0.5 smd: A2(-11.5,12.5) A3(-10.5,12.5) A4(-9.5,12.5) A5(-8.5,12.5) A6(-7.5,12.5) A7(-6.5,12.5) A8(-5.5,12.5) A9(-4.5,12.5) A10(-3.5,12.5) A11(-2.5,12.5) A12(-1.5,12.5) A13(-0.5,12.5) A14(0.5,12.5) A15(1.5,12.5) A16(2.5,12.5) A17(3.5,12.5) A18(4.5,12.5) A19(5.5,12.5) A20(6.5,12.5) A21(7.5,12.5) A22(8.5,12.5) A23(9.5,12.5) A24(10.5,12.5) A25(11.5,12.5) AA1(-12.5,-7.5) AA2(-11.5,-7.5) AA3(-10.5,-7.5) AA4(-9.5,-7.5) AA5(-8.5,-7.5) AA6(-7.5,-7.5) AA7(-6.5,-7.5) AA8(-5.5,-7.5) AA9(-4.5,-7.5) AA10(-3.5,-7.5) AA11(-2.5,-7.5) AA12(-1.5,-7.5) AA13(-0.5,-7.5) AA14(0.5,-7.5) AA15(1.5,-7.5) AA16(2.5,-7.5) AA17(3.5,-7.5) AA18(4.5,-7.5) AA19(5.5,-7.5) AA20(6.5,-7.5) AA21(7.5,-7.5) AA22(8.5,-7.5) AA23(9.5,-7.5) AA24(10.5,-7.5) AA25(11.5,-7.5) AA26(12.5,-7.5) AB1(-12.5,-8.5) AB2(-11.5,-8.5) AB3(-10.5,-8.5) AB4(-9.5,-8.5) AB5(-8.5,-8.5) AB6(-7.5,-8.5) AB7(-6.5,-8.5) AB8(-5.5,-8.5) AB9(-4.5,-8.5) AB10(-3.5,-8.5) AB11(-2.5,-8.5) AB12(-1.5,-8.5) AB13(-0.5,-8.5) AB14(0.5,-8.5) AB15(1.5,-8.5) AB16(2.5,-8.5) AB17(3.5,-8.5) AB18(4.5,-8.5) AB19(5.5,-8.5) AB20(6.5,-8.5) AB21(7.5,-8.5) AB22(8.5,-8.5) AB23(9.5,-8.5) AB24(10.5,-8.5) AB25(11.5,-8.5) AB26(12.5,-8.5) AC1(-12.5,-9.5) AC2(-11.5,-9.5) AC3(-10.5,-9.5) AC4(-9.5,-9.5) AC5(-8.5,-9.5) AC6(-7.5,-9.5) AC7(-6.5,-9.5) AC8(-5.5,-9.5) AC9(-4.5,-9.5) AC10(-3.5,-9.5) AC11(-2.5,-9.5) AC12(-1.5,-9.5) AC13(-0.5,-9.5) AC14(0.5,-9.5) AC15(1.5,-9.5) AC16(2.5,-9.5) AC17(3.5,-9.5) AC18(4.5,-9.5) AC19(5.5,-9.5) AC20(6.5,-9.5) AC21(7.5,-9.5) AC22(8.5,-9.5) AC23(9.5,-9.5) AC24(10.5,-9.5) AC25(11.5,-9.5) AC26(12.5,-9.5) AD1(-12.5,-10.5) AD2(-11.5,-10.5) AD3(-10.5,-10.5) AD4(-9.5,-10.5) AD5(-8.5,-10.5) AD6(-7.5,-10.5) AD7(-6.5,-10.5) AD8(-5.5,-10.5) AD9(-4.5,-10.5) AD10(-3.5,-10.5) AD11(-2.5,-10.5) AD12(-1.5,-10.5) AD13(-0.5,-10.5) AD14(0.5,-10.5) AD15(1.5,-10.5) AD16(2.5,-10.5) AD17(3.5,-10.5) AD18(4.5,-10.5) AD19(5.5,-10.5) AD20(6.5,-10.5) AD21(7.5,-10.5) AD22(8.5,-10.5) AD23(9.5,-10.5) AD24(10.5,-10.5) AD25(11.5,-10.5) AD26(12.5,-10.5) AE1(-12.5,-11.5) AE2(-11.5,-11.5) AE3(-10.5,-11.5) AE4(-9.5,-11.5) AE5(-8.5,-11.5) AE6(-7.5,-11.5) AE7(-6.5,-11.5) AE8(-5.5,-11.5) AE9(-4.5,-11.5) AE10(-3.5,-11.5) AE11(-2.5,-11.5) AE12(-1.5,-11.5) AE13(-0.5,-11.5) AE14(0.5,-11.5) AE15(1.5,-11.5) AE16(2.5,-11.5) AE17(3.5,-11.5) AE18(4.5,-11.5) AE19(5.5,-11.5) AE20(6.5,-11.5) AE21(7.5,-11.5) AE22(8.5,-11.5) AE23(9.5,-11.5) AE24(10.5,-11.5) AE25(11.5,-11.5) AE26(12.5,-11.5) AF2(-11.5,-12.5) AF3(-10.5,-12.5) AF4(-9.5,-12.5) AF5(-8.5,-12.5) AF6(-7.5,-12.5) AF7(-6.5,-12.5) AF8(-5.5,-12.5) AF9(-4.5,-12.5) AF10(-3.5,-12.5) AF11(-2.5,-12.5) AF12(-1.5,-12.5) AF13(-0.5,-12.5) AF14(0.5,-12.5) AF15(1.5,-12.5) AF16(2.5,-12.5) AF17(3.5,-12.5) AF18(4.5,-12.5) AF19(5.5,-12.5) AF20(6.5,-12.5) AF21(7.5,-12.5) AF22(8.5,-12.5) AF23(9.5,-12.5) AF24(10.5,-12.5) AF25(11.5,-12.5) B1(-12.5,11.5) B2(-11.5,11.5) B3(-10.5,11.5) B4(-9.5,11.5) B5(-8.5,11.5) B6(-7.5,11.5) B7(-6.5,11.5) B8(-5.5,11.5) B9(-4.5,11.5) B10(-3.5,11.5) B11(-2.5,11.5) B12(-1.5,11.5) B13(-0.5,11.5) B14(0.5,11.5) B15(1.5,11.5) B16(2.5,11.5) B17(3.5,11.5) B18(4.5,11.5) B19(5.5,11.5) B20(6.5,11.5) B21(7.5,11.5) B22(8.5,11.5) B23(9.5,11.5) B24(10.5,11.5) B25(11.5,11.5) B26(12.5,11.5) C1(-12.5,10.5) C2(-11.5,10.5) C3(-10.5,10.5) C4(-9.5,10.5) C5(-8.5,10.5) C6(-7.5,10.5) C7(-6.5,10.5) C8(-5.5,10.5) C9(-4.5,10.5) C10(-3.5,10.5) C11(-2.5,10.5) C12(-1.5,10.5) C13(-0.5,10.5) C14(0.5,10.5) C15(1.5,10.5) C16(2.5,10.5) C17(3.5,10.5) C18(4.5,10.5) C19(5.5,10.5) C20(6.5,10.5) C21(7.5,10.5) C22(8.5,10.5) C23(9.5,10.5) C24(10.5,10.5) C25(11.5,10.5) C26(12.5,10.5) D1(-12.5,9.5) D2(-11.5,9.5) D3(-10.5,9.5) D4(-9.5,9.5) D5(-8.5,9.5) D6(-7.5,9.5) D7(-6.5,9.5) D8(-5.5,9.5) D9(-4.5,9.5) D10(-3.5,9.5) D11(-2.5,9.5) D12(-1.5,9.5) D13(-0.5,9.5) D14(0.5,9.5) D15(1.5,9.5) D16(2.5,9.5) D17(3.5,9.5) D18(4.5,9.5) D19(5.5,9.5) D20(6.5,9.5) D21(7.5,9.5) D22(8.5,9.5) D23(9.5,9.5) D24(10.5,9.5) D25(11.5,9.5) D26(12.5,9.5) E1(-12.5,8.5) E2(-11.5,8.5) E3(-10.5,8.5) E4(-9.5,8.5) E5(-8.5,8.5) E6(-7.5,8.5) E7(-6.5,8.5) E8(-5.5,8.5) E9(-4.5,8.5) E10(-3.5,8.5) E11(-2.5,8.5) E12(-1.5,8.5) E13(-0.5,8.5) E14(0.5,8.5) E15(1.5,8.5) E16(2.5,8.5) E17(3.5,8.5) E18(4.5,8.5) E19(5.5,8.5) E20(6.5,8.5) E21(7.5,8.5) E22(8.5,8.5) E23(9.5,8.5) E24(10.5,8.5) E25(11.5,8.5) E26(12.5,8.5) F1(-12.5,7.5) F2(-11.5,7.5) F3(-10.5,7.5) F4(-9.5,7.5) F5(-8.5,7.5) F6(-7.5,7.5) F7(-6.5,7.5) F8(-5.5,7.5) F9(-4.5,7.5) F10(-3.5,7.5) F11(-2.5,7.5) F12(-1.5,7.5) F13(-0.5,7.5) F14(0.5,7.5) F15(1.5,7.5) F16(2.5,7.5) F17(3.5,7.5) F18(4.5,7.5) F19(5.5,7.5) F20(6.5,7.5) F21(7.5,7.5) F22(8.5,7.5) F23(9.5,7.5) F24(10.5,7.5) F25(11.5,7.5) F26(12.5,7.5) G1(-12.5,6.5) G2(-11.5,6.5) G3(-10.5,6.5) G4(-9.5,6.5) G5(-8.5,6.5) G6(-7.5,6.5) G7(-6.5,6.5) G8(-5.5,6.5) G9(-4.5,6.5) G10(-3.5,6.5) G11(-2.5,6.5) G12(-1.5,6.5) G13(-0.5,6.5) G14(0.5,6.5) G15(1.5,6.5) G16(2.5,6.5) G17(3.5,6.5) G18(4.5,6.5) G19(5.5,6.5) G20(6.5,6.5) G21(7.5,6.5) G22(8.5,6.5) G23(9.5,6.5) G24(10.5,6.5) G25(11.5,6.5) G26(12.5,6.5) H1(-12.5,5.5) H2(-11.5,5.5) H3(-10.5,5.5) H4(-9.5,5.5) H5(-8.5,5.5) H6(-7.5,5.5) H7(-6.5,5.5) H8(-5.5,5.5) H9(-4.5,5.5) H10(-3.5,5.5) H11(-2.5,5.5) H12(-1.5,5.5) H13(-0.5,5.5) H14(0.5,5.5) H15(1.5,5.5) H16(2.5,5.5) H17(3.5,5.5) H18(4.5,5.5) H19(5.5,5.5) H20(6.5,5.5) H21(7.5,5.5) H22(8.5,5.5) H23(9.5,5.5) H24(10.5,5.5) H25(11.5,5.5) H26(12.5,5.5) J1(-12.5,4.5) J2(-11.5,4.5) J3(-10.5,4.5) J4(-9.5,4.5) J5(-8.5,4.5) J6(-7.5,4.5) J7(-6.5,4.5) J8(-5.5,4.5) J10(-3.5,4.5) J11(-2.5,4.5) J12(-1.5,4.5) J13(-0.5,4.5) J14(0.5,4.5) J15(1.5,4.5) J16(2.5,4.5) J17(3.5,4.5) J19(5.5,4.5) J20(6.5,4.5) J21(7.5,4.5) J22(8.5,4.5) J23(9.5,4.5) J24(10.5,4.5) J25(11.5,4.5) J26(12.5,4.5) K1(-12.5,3.5) K2(-11.5,3.5) K3(-10.5,3.5) K4(-9.5,3.5) K5(-8.5,3.5) K6(-7.5,3.5) K7(-6.5,3.5) K8(-5.5,3.5) K9(-4.5,3.5) K10(-3.5,3.5) K11(-2.5,3.5) K12(-1.5,3.5) K13(-0.5,3.5) K14(0.5,3.5) K15(1.5,3.5) K16(2.5,3.5) K17(3.5,3.5) K18(4.5,3.5) K19(5.5,3.5) K20(6.5,3.5) K21(7.5,3.5) K22(8.5,3.5) K23(9.5,3.5) K24(10.5,3.5) K25(11.5,3.5) K26(12.5,3.5) L1(-12.5,2.5) L2(-11.5,2.5) L3(-10.5,2.5) L4(-9.5,2.5) L5(-8.5,2.5) L6(-7.5,2.5) L7(-6.5,2.5) L8(-5.5,2.5) L9(-4.5,2.5) L10(-3.5,2.5) L11(-2.5,2.5) L12(-1.5,2.5) L13(-0.5,2.5) L14(0.5,2.5) L15(1.5,2.5) L16(2.5,2.5) L17(3.5,2.5) L18(4.5,2.5) L19(5.5,2.5) L20(6.5,2.5) L21(7.5,2.5) L22(8.5,2.5) L23(9.5,2.5) L24(10.5,2.5) L25(11.5,2.5) L26(12.5,2.5) M1(-12.5,1.5) M2(-11.5,1.5) M3(-10.5,1.5) M4(-9.5,1.5) M5(-8.5,1.5) M6(-7.5,1.5) M7(-6.5,1.5) M8(-5.5,1.5) M9(-4.5,1.5) M10(-3.5,1.5) M11(-2.5,1.5) M12(-1.5,1.5) M13(-0.5,1.5) M14(0.5,1.5) M15(1.5,1.5) M16(2.5,1.5) M17(3.5,1.5) M18(4.5,1.5) M19(5.5,1.5) M20(6.5,1.5) M21(7.5,1.5) M22(8.5,1.5) M23(9.5,1.5) M24(10.5,1.5) M25(11.5,1.5) M26(12.5,1.5) N1(-12.5,0.5) N2(-11.5,0.5) N3(-10.5,0.5) N4(-9.5,0.5) N5(-8.5,0.5) N6(-7.5,0.5) N7(-6.5,0.5) N8(-5.5,0.5) N9(-4.5,0.5) N10(-3.5,0.5) N11(-2.5,0.5) N12(-1.5,0.5) N13(-0.5,0.5) N14(0.5,0.5) N15(1.5,0.5) N16(2.5,0.5) N17(3.5,0.5) N18(4.5,0.5) N19(5.5,0.5) N20(6.5,0.5) N21(7.5,0.5) N22(8.5,0.5) N23(9.5,0.5) N24(10.5,0.5) N25(11.5,0.5) N26(12.5,0.5) P1(-12.5,-0.5) P2(-11.5,-0.5) P3(-10.5,-0.5) P4(-9.5,-0.5) P5(-8.5,-0.5) P6(-7.5,-0.5) P7(-6.5,-0.5) P8(-5.5,-0.5) P9(-4.5,-0.5) P10(-3.5,-0.5) P11(-2.5,-0.5) P12(-1.5,-0.5) P13(-0.5,-0.5) P14(0.5,-0.5) P15(1.5,-0.5) P16(2.5,-0.5) P17(3.5,-0.5) P18(4.5,-0.5) P19(5.5,-0.5) P20(6.5,-0.5) P21(7.5,-0.5) P22(8.5,-0.5) P23(9.5,-0.5) P24(10.5,-0.5) P25(11.5,-0.5) P26(12.5,-0.5) R1(-12.5,-1.5) R2(-11.5,-1.5) R3(-10.5,-1.5) R4(-9.5,-1.5) R5(-8.5,-1.5) R6(-7.5,-1.5) R7(-6.5,-1.5) R8(-5.5,-1.5) R9(-4.5,-1.5) R10(-3.5,-1.5) R11(-2.5,-1.5) R12(-1.5,-1.5) R13(-0.5,-1.5) R14(0.5,-1.5) R15(1.5,-1.5) R16(2.5,-1.5) R17(3.5,-1.5) R18(4.5,-1.5) R19(5.5,-1.5) R20(6.5,-1.5) R21(7.5,-1.5) R22(8.5,-1.5) R23(9.5,-1.5) R24(10.5,-1.5) R25(11.5,-1.5) R26(12.5,-1.5) T1(-12.5,-2.5) T2(-11.5,-2.5) T3(-10.5,-2.5) T4(-9.5,-2.5) T5(-8.5,-2.5) T6(-7.5,-2.5) T7(-6.5,-2.5) T8(-5.5,-2.5) T9(-4.5,-2.5) T10(-3.5,-2.5) T11(-2.5,-2.5) T12(-1.5,-2.5) T13(-0.5,-2.5) T14(0.5,-2.5) T15(1.5,-2.5) T16(2.5,-2.5) T17(3.5,-2.5) T18(4.5,-2.5) T19(5.5,-2.5) T20(6.5,-2.5) T21(7.5,-2.5) T22(8.5,-2.5) T23(9.5,-2.5) T24(10.5,-2.5) T25(11.5,-2.5) T26(12.5,-2.5) U1(-12.5,-3.5) U2(-11.5,-3.5) U3(-10.5,-3.5) U4(-9.5,-3.5) U5(-8.5,-3.5) U6(-7.5,-3.5) U7(-6.5,-3.5) U8(-5.5,-3.5) U9(-4.5,-3.5) U10(-3.5,-3.5) U11(-2.5,-3.5) U12(-1.5,-3.5) U13(-0.5,-3.5) U14(0.5,-3.5) U15(1.5,-3.5) U16(2.5,-3.5) U17(3.5,-3.5) U18(4.5,-3.5) U19(5.5,-3.5) U20(6.5,-3.5) U21(7.5,-3.5) U22(8.5,-3.5) U23(9.5,-3.5) U24(10.5,-3.5) U25(11.5,-3.5) U26(12.5,-3.5) V1(-12.5,-4.5) V2(-11.5,-4.5) V3(-10.5,-4.5) V4(-9.5,-4.5) V5(-8.5,-4.5) V6(-7.5,-4.5) V7(-6.5,-4.5) V8(-5.5,-4.5) V10(-3.5,-4.5) V11(-2.5,-4.5) V12(-1.5,-4.5) V13(-0.5,-4.5) V14(0.5,-4.5) V15(1.5,-4.5) V16(2.5,-4.5) V17(3.5,-4.5) V19(5.5,-4.5) V20(6.5,-4.5) V21(7.5,-4.5) V22(8.5,-4.5) V23(9.5,-4.5) V24(10.5,-4.5) V25(11.5,-4.5) V26(12.5,-4.5) W1(-12.5,-5.5) W2(-11.5,-5.5) W3(-10.5,-5.5) W4(-9.5,-5.5) W5(-8.5,-5.5) W6(-7.5,-5.5) W7(-6.5,-5.5) W8(-5.5,-5.5) W9(-4.5,-5.5) W10(-3.5,-5.5) W11(-2.5,-5.5) W12(-1.5,-5.5) W13(-0.5,-5.5) W14(0.5,-5.5) W15(1.5,-5.5) W16(2.5,-5.5) W17(3.5,-5.5) W18(4.5,-5.5) W19(5.5,-5.5) W20(6.5,-5.5) W21(7.5,-5.5) W22(8.5,-5.5) W23(9.5,-5.5) W24(10.5,-5.5) W25(11.5,-5.5) W26(12.5,-5.5) Y1(-12.5,-6.5) Y2(-11.5,-6.5) Y3(-10.5,-6.5) Y4(-9.5,-6.5) Y5(-8.5,-6.5) Y6(-7.5,-6.5) Y7(-6.5,-6.5) Y8(-5.5,-6.5) Y9(-4.5,-6.5) Y10(-3.5,-6.5) Y11(-2.5,-6.5) Y12(-1.5,-6.5) Y13(-0.5,-6.5) Y14(0.5,-6.5) Y15(1.5,-6.5) Y16(2.5,-6.5) Y17(3.5,-6.5) Y18(4.5,-6.5) Y19(5.5,-6.5) Y20(6.5,-6.5) Y21(7.5,-6.5) Y22(8.5,-6.5) Y23(9.5,-6.5) Y24(10.5,-6.5) Y25(11.5,-6.5) Y26(12.5,-6.5)
  silkscreen extent -14.27,-13.5 13.5,13.5

## Part data
C1 C19 C20 C21 C22 C23 C24 C25 C27 C28 C29 C30 C31 C32 C34 C35 C37 C38 C39 C40 C41 C43 C44 C45 C47 C48 C49 C50 C51 C52 C53 C54 C55 C56 C57 C58 C59 C60 C61 C62 C65 C67 C68 C69 C72 C73 C75 C76 C77 C78 C79 C80 C81 C82 C83 C84 C85 C86 C87 C88 C89 C90 C91 C92 C93 C104 C105 C106 C107 C108 C109 C110 C114 C115 C128 C129 C130 C131 C132 C136 C137 C138 C139: "Standard Capacitor"
C2 C116 C117 C118 C119 C120 C123 C124 C126 C127: library part POLCAP, "Standard Capacitor"
C3 C4 C16 C17 C46 C121 C122 C125: library part CAPACITOR, "Standard Capacitor"
C5 C6 C7 C8 C9 C10 C11 C12 C13 C14 C15 C18: library part POLCAP2, "Standard Capacitor"
CONN2 CONN3: library part PCFANHEADER
DS1 DS2: "Typical BLUE SiC LED"
DSP0 DSP1 DSP2 DSP3 DSP4 DSP5 DSP6 DSP7 DSP8 DSP9 DSP10 DSP11 DSP12 DSP13 DSP14 DSP15: library part SATA-23
FID1 FID2 FID3 FID4 FID5 FID6 FID7 FID8 FID10 FID11 FID12: "Fiducial"
J1 J2 J3: library part SATA-7
JP1: "Header, 2-Pin"
JP2: "Header, 7-Pin, Dual row"
O2: "ECS SMD Oscillator, ECS-3953M"
P1: "Header, 4-Pin"
P2 P3 P4 P5: "Header, 8-Pin, Dual row"
P6: "Header, 3-Pin"
PM1 PM2 PM3: library part PTH12010W, "12A 12V Input Non-isolated wide-output adj"
R1 R2 R3 R4 R5 R6 R7 R12 R13 R14 R15 R16 R17 R18 R20 R21 R22: library part RESISTOR, "Standard Passive Resistor"
R9 R10 R11 R19: "Standard Passive Resistor"
S1 S2 S3 S4 S5 S6 S7 S8: library part MNTSCREW
U1: library part TPS768XX, "TI 1.5A LDO"
U2: library part TPS786XX, "TI 1.5A LDO"
U3: library part C8051F342/3/6/7, "SiLiabs USB Micro"
U4: "Micron DDR2 SDRAM"
U5: library part PTH03000
U6: library part TSP76201, "TI 100mA LDO"
U10: "Xilinx Virtex-4"

## Via types
v1: diameter 40, hole 20, Top Layer to Bottom Layer, 338 vias
v2: diameter 20, hole 10, Top Layer to Bottom Layer, tented top, 325 vias
v3: diameter 20, hole 10, Top Layer to Bottom Layer, 197 vias
v4: diameter 40, hole 25, Top Layer to Bottom Layer, 113 vias
v5: diameter 50, hole 25, Top Layer to Bottom Layer, 48 vias
v6: diameter 30, hole 15, Top Layer to Bottom Layer, 3 vias

## Nets (pads, with @x,y where several pads share a name; then routed paths per layer and width w, separated by ;. In a path a pad name is that pad's centre, name@x,y a point inside that pad or via, vN(x,y) a via of type N, cw(c..) or ccw(c..) an arc to the next point about the centre after c; other vN are vias at no path point)
3.3VCC: R20.1 | length 39.4
  Top Layer w6: v3(9055.12,3326.77) R20.1@9094.49,3326.77
+0.9VCC: C1.1 C132.1 R17.1 U4.J2 U6.5 U10.AC20 U10.W24 U10.Y21 U10.Y23 | length 1947.9
  Top Layer w6: U10.AC20@9783.46,3917.32 v2(9803.15,3937.01) v2(9803.15,4015.75) U10.Y21@9822.83,4035.43 9842.52,4055.12 v2(9960.63,4055.12) U10.W24@9940.95,4074.8 9960.63,4094.49 10039.37,4094.49 10078.74,4055.12 10098.43,4055.12 10285.43,3868.11 10285.43,3622.05 10297.24,3610.24 10299.21,3610.24 10299.21,3551.19 U4.J2@10283.44,3535.43 ; 9881.89,4055.12 U10.Y23@9901.58,4035.43 ; 10285.43,3661.42 10314.96,3690.94 10472.44,3690.94 10566.91,3785.41 C1.1@10566.91,3809.06
  Top Layer w16: C1.1@10490,3815 10495.94,3809.06 10600.39,3809.06 10659.45,3750 U6.5@10698.82,3750 ; C1.1@10561.97,3810 R17.1@10669.29,3917.32
  Bottom Layer w10: v2(9960.63,4055.12) 10000,4094.49 C132.1@10019.68,4094.49
+1.2VCC: C28.1 C73.1 C76.1 C86.1 C88.1 C90.1 U5.5 U10.J10 U10.J11 U10.J16 U10.J17 U10.K9 U10.K10 U10.K17 U10.K18 U10.L9 U10.L10 U10.L11 U10.L16 U10.L17 U10.L18 U10.M12 U10.M15 U10.R12 U10.R15 U10.T9 U10.T10 U10.T11 U10.T16 U10.T17 U10.T18 U10.U9 U10.U10 U10.U17 U10.U18 U10.V10 U10.V11 U10.V16 U10.V17 | length 1315.5
  Top Layer w6: v2(9330.71,4133.86) U10.U9@9350.39,4153.54 ; v2(9330.71,4173.23) U10.T9@9350.39,4192.91 ; v2(9330.71,4448.82) U10.K9@9350.39,4429.13 ; v2(9370.08,4094.49) U10.V10@9389.76,4114.17 ; v2(9370.08,4173.23) U10.T10@9389.76,4192.91 ; v2(9370.08,4488.19) U10.J10@9389.76,4468.5 ; v2(9409.45,4094.49) U10.V11@9429.13,4114.17 ; v2(9409.45,4173.23) U10.T11@9429.13,4192.91 ; v2(9409.45,4409.45) U10.L11@9429.13,4389.76 ; v2(9409.45,4488.19) U10.J11@9429.13,4468.5 ; v2(9448.82,4212.6) U10.R12@9468.5,4232.28 ; v2(9448.82,4370.08) U10.M12@9468.5,4350.39 ; U10.R15@9586.61,4232.28 v2(9606.3,4212.6) ; U10.M15@9586.61,4350.39 v2(9606.3,4370.08) ; U10.T16@9625.98,4192.91 v2(9645.67,4173.23) ; U10.L16@9625.98,4389.76 v2(9645.67,4409.45) ; U10.J16@9625.98,4468.5 v2(9645.67,4488.19) ; U10.T17@9665.35,4192.91 v2(9685.04,4173.23) U10.U17@9665.35,4153.54 v2(9685.04,4133.86) ; U10.L17@9665.35,4389.76 v2(9685.04,4409.45) ; U10.K17@9665.35,4429.13 v2(9685.04,4448.82) ; U10.J17@9665.35,4468.5 v2(9685.04,4488.19) ; U10.U18@9704.72,4153.54 v2(9724.41,4173.23) U10.T18@9704.72,4192.91 ; U10.L18@9704.72,4389.76 v2(9724.41,4409.45) ; U10.K18@9704.72,4429.13 v2(9724.41,4448.82)
  Top Layer w8: v2(9330.71,4409.45) U10.L9@9350.39,4389.76 ; v2(9370.08,4133.86) U10.U10@9389.76,4153.54 ; v2(9370.08,4409.45) U10.L10@9389.76,4389.76 ; v2(9370.08,4448.82) U10.K10@9389.76,4429.13 ; U10.V16@9625.98,4114.17 v2(9645.67,4094.49) ; U10.V17@9665.35,4114.17 v2(9685.04,4094.49)
  Top Layer w24: v1(10226.38,4035.43) C28.1@10314.96,4035.43
  Bottom Layer w6: v2(9448.82,4212.6) 9468.5,4232.28 ; 9586.61,4232.28 v2(9606.3,4212.6)
  Bottom Layer w10: C88.1@9285.43,4173.23 v2(9330.71,4173.23) ; C76.1@9285.43,4409.45 v2(9330.71,4409.45) ; C73.1@9606.3,4513.72 9620.14,4513.72 v2(9645.67,4488.19) ; v2(9724.41,4173.23) 9748.03,4196.85 C90.1@9773.56,4196.85 ; v2(9724.41,4409.45) C86.1@9777.56,4409.45
+1.8VCC: C16.2 C128.1 C129.1 C130.1 C131.1 C136.1 C137.1 C138.1 C139.1 R15.1 U1.4 U4.A1 U4.A9 U4.C1 U4.C3 U4.C7 U4.C9 U4.E1 U4.E9 U4.G1 U4.G3 U4.G7 U4.G9 U4.J1 U4.J9 U4.M9 U4.R1 U10.AA22 U10.AA25 U10.AB19 U10.AE19 U10.AE22 U10.V19 U10.W17 U10.W18 | length 1517.5
  Top Layer w6: v3(9635.83,3208.66) 9635.83,3257.87 ; 9635.83,3255 9640,3259.17 R15.1@9640,3285 ; v2(9645.67,4055.12) U10.W17@9665.35,4074.8 ; v2(9685.04,4055.12) U10.W18@9704.72,4074.8 ; v2(9724.41,3818.9) U10.AE19@9744.09,3838.58 ; v2(9724.41,4133.86) U10.V19@9744.09,4114.17 ; U10.AB19@9744.09,3956.69 v2(9763.78,3976.38) ; U10.AE22@9862.2,3838.58 v2(9881.89,3858.27) ; U10.AA22@9862.2,3996.06 v2(9881.89,3976.38) ; v2(9960.63,4015.75) U10.AA25@9980.32,3996.06 ; U4.R1@10094.47,3566.92 v3(10094.47,3598.4) ; U4.M9@10188.96,3314.95 10188.96,3295.3 v3(10192.91,3291.34) ; v3(10263.78,3279.53) 10263.78,3295.29 U4.J9@10283.44,3314.95 ; v3(10279.53,3590.55) 10283.44,3586.63 U4.J1@10283.44,3566.92 ; v3(10326.77,3472.44) 10346.44,3492.11 U4.G3@10346.44,3503.93 ; v3(10346.44,3291.36) U4.G9@10346.44,3314.95 10330.71,3330.68 10330.71,3362.22 U4.G7@10346.44,3377.95 ; U4.G1@10346.46,3562.99 10346.46,3578.74 v3(10358.27,3590.55) ; U4.E9@10409.43,3314.95 10409.43,3299.23 v3(10417.32,3291.34) ; U4.E1@10409.43,3566.92 v3(10409.43,3598.4) ; v3(10472.42,3279.55) U4.C9@10472.42,3314.95 ; U4.C7@10472.42,3377.95 10488.19,3393.71 v3(10488.19,3409.45) ; v3(10472.42,3468.52) U4.C3@10472.42,3503.93 ; U4.C1@10472.42,3566.92 v3(10472.42,3602.34) ; U4.A9@10535.41,3314.95 v3(10566.92,3314.95) ; U4.A1@10535.41,3566.92 v3(10562.99,3566.92)
  Top Layer w30: U1.4@12647.64,3631.89 12834.65,3631.89 C16.2@12848.42,3645.66
  Bottom Layer w8: C139.1@10236.2,3592.51 10238.16,3590.55 v3(10279.53,3590.55) ; C138.1@10466.51,3362.2 10466.51,3387.77 v3(10488.19,3409.45) ; C136.1@10511.79,3561.02 10557.08,3561.02 v3(10562.99,3566.92)
  Bottom Layer w10: v2(9685.04,4055.12) 9706.67,4033.48 C128.1@9706.67,4015.74 ; v2(9724.41,3818.9) 9730.32,3812.98 C131.1@9763.76,3812.98 ; C129.1@9842.52,4035.43 9842.52,4015.75 v2(9881.89,3976.38) ; v2(9960.63,4015.75) 9966.52,4009.86 C130.1@9966.52,3984.24 ; C137.1@10236.22,3346.46 C137.1@10246.06,3356.3
  Bottom Layer w12: C137.1@10244.07,3352.36 10263.78,3332.65 v3(10263.78,3279.53)
  other v4: 12785.43,3631.89